# Altium PCB PCB de PWM.PcbDoc
Units mm, origin at the board's own origin, x right, y up, seen from the top; angles counter-clockwise.
Board outline 49.02 x 53.8 mm, 2 copper layers (Top Layer, Bottom Layer); 20 components, 11 nets, 57 pads, 0 vias.
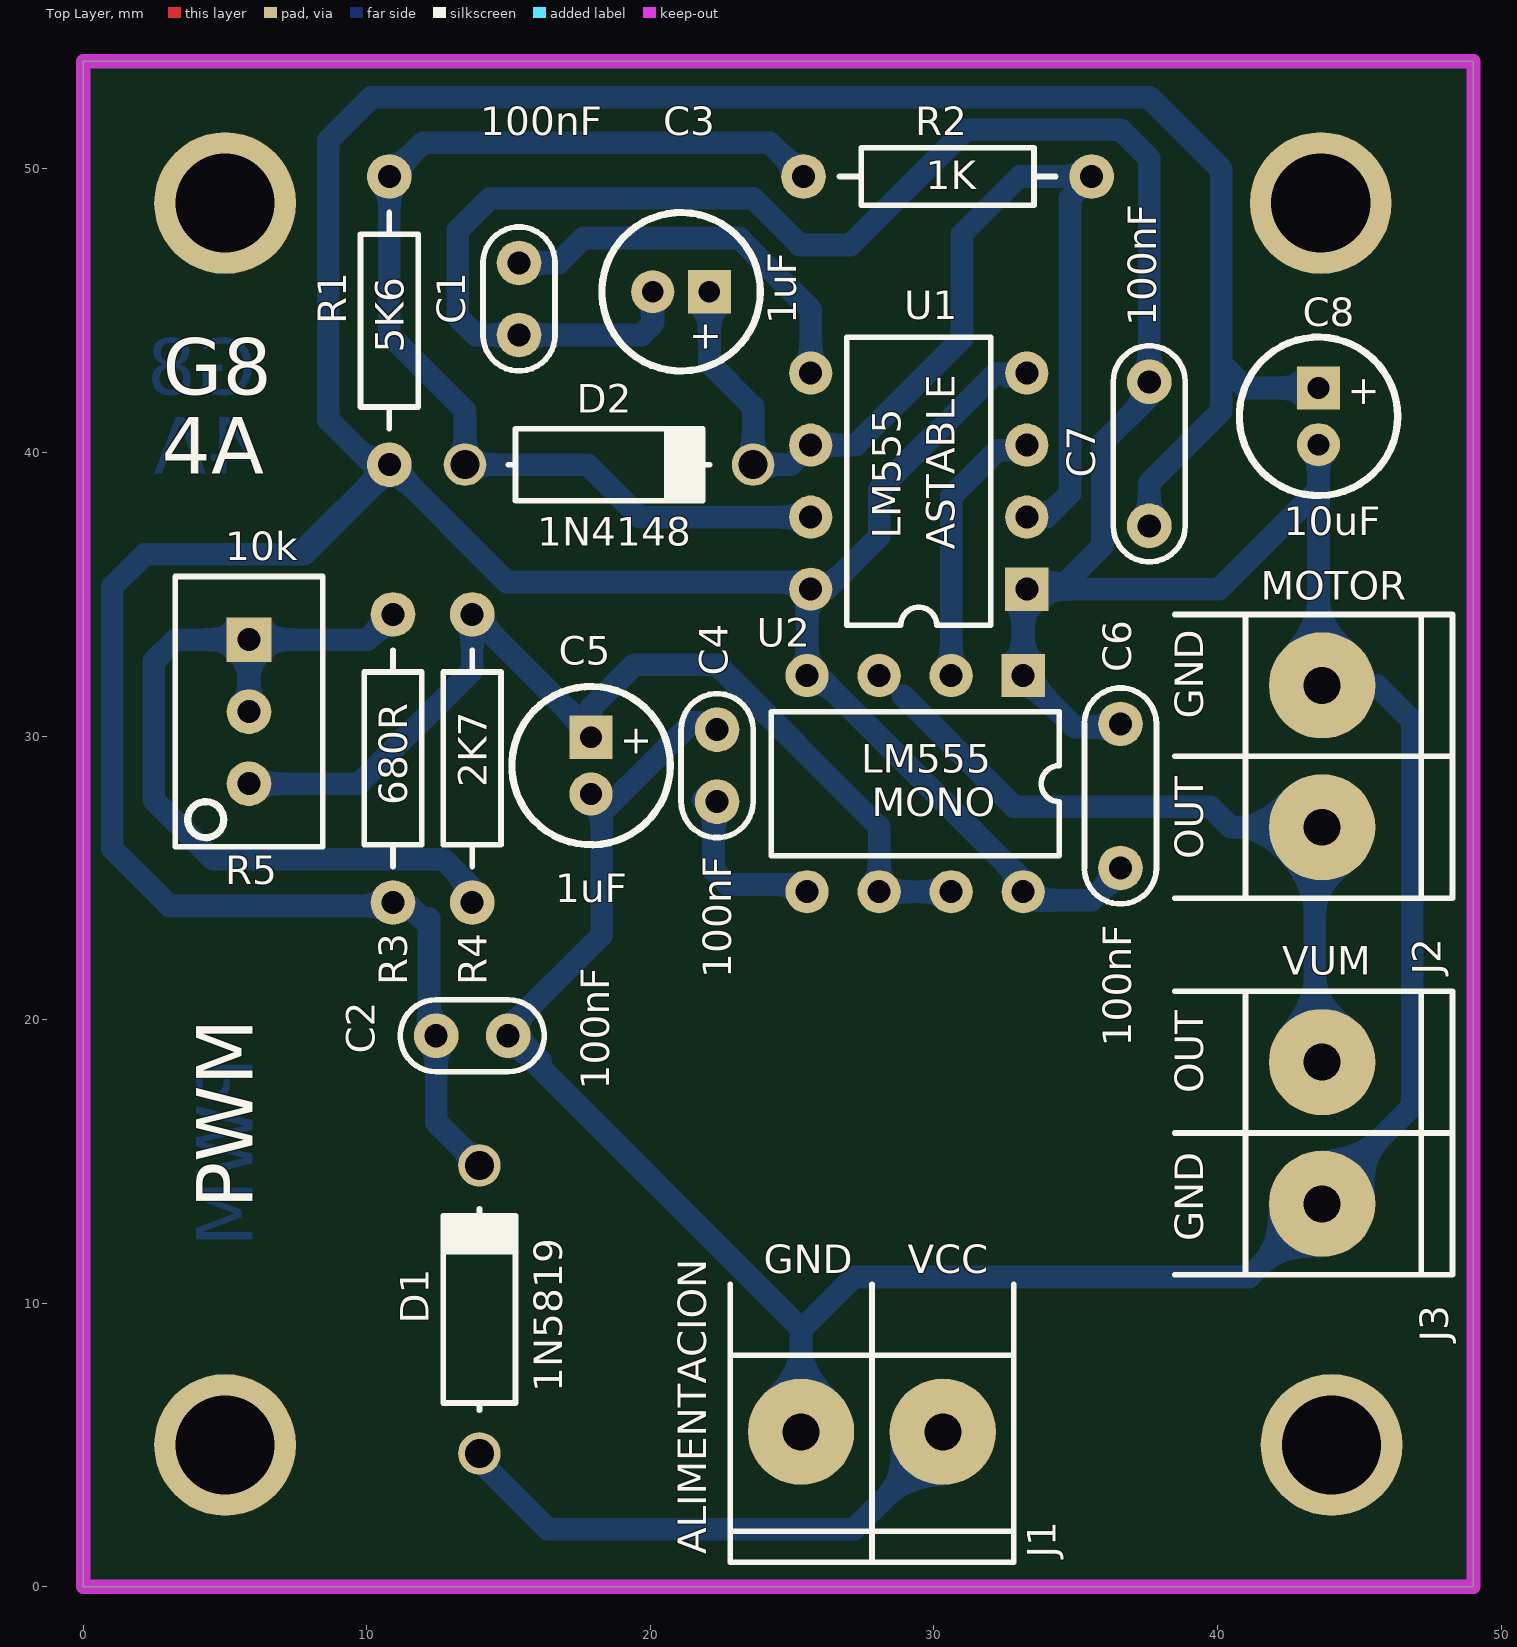
[diagram p0: Top Layer view]
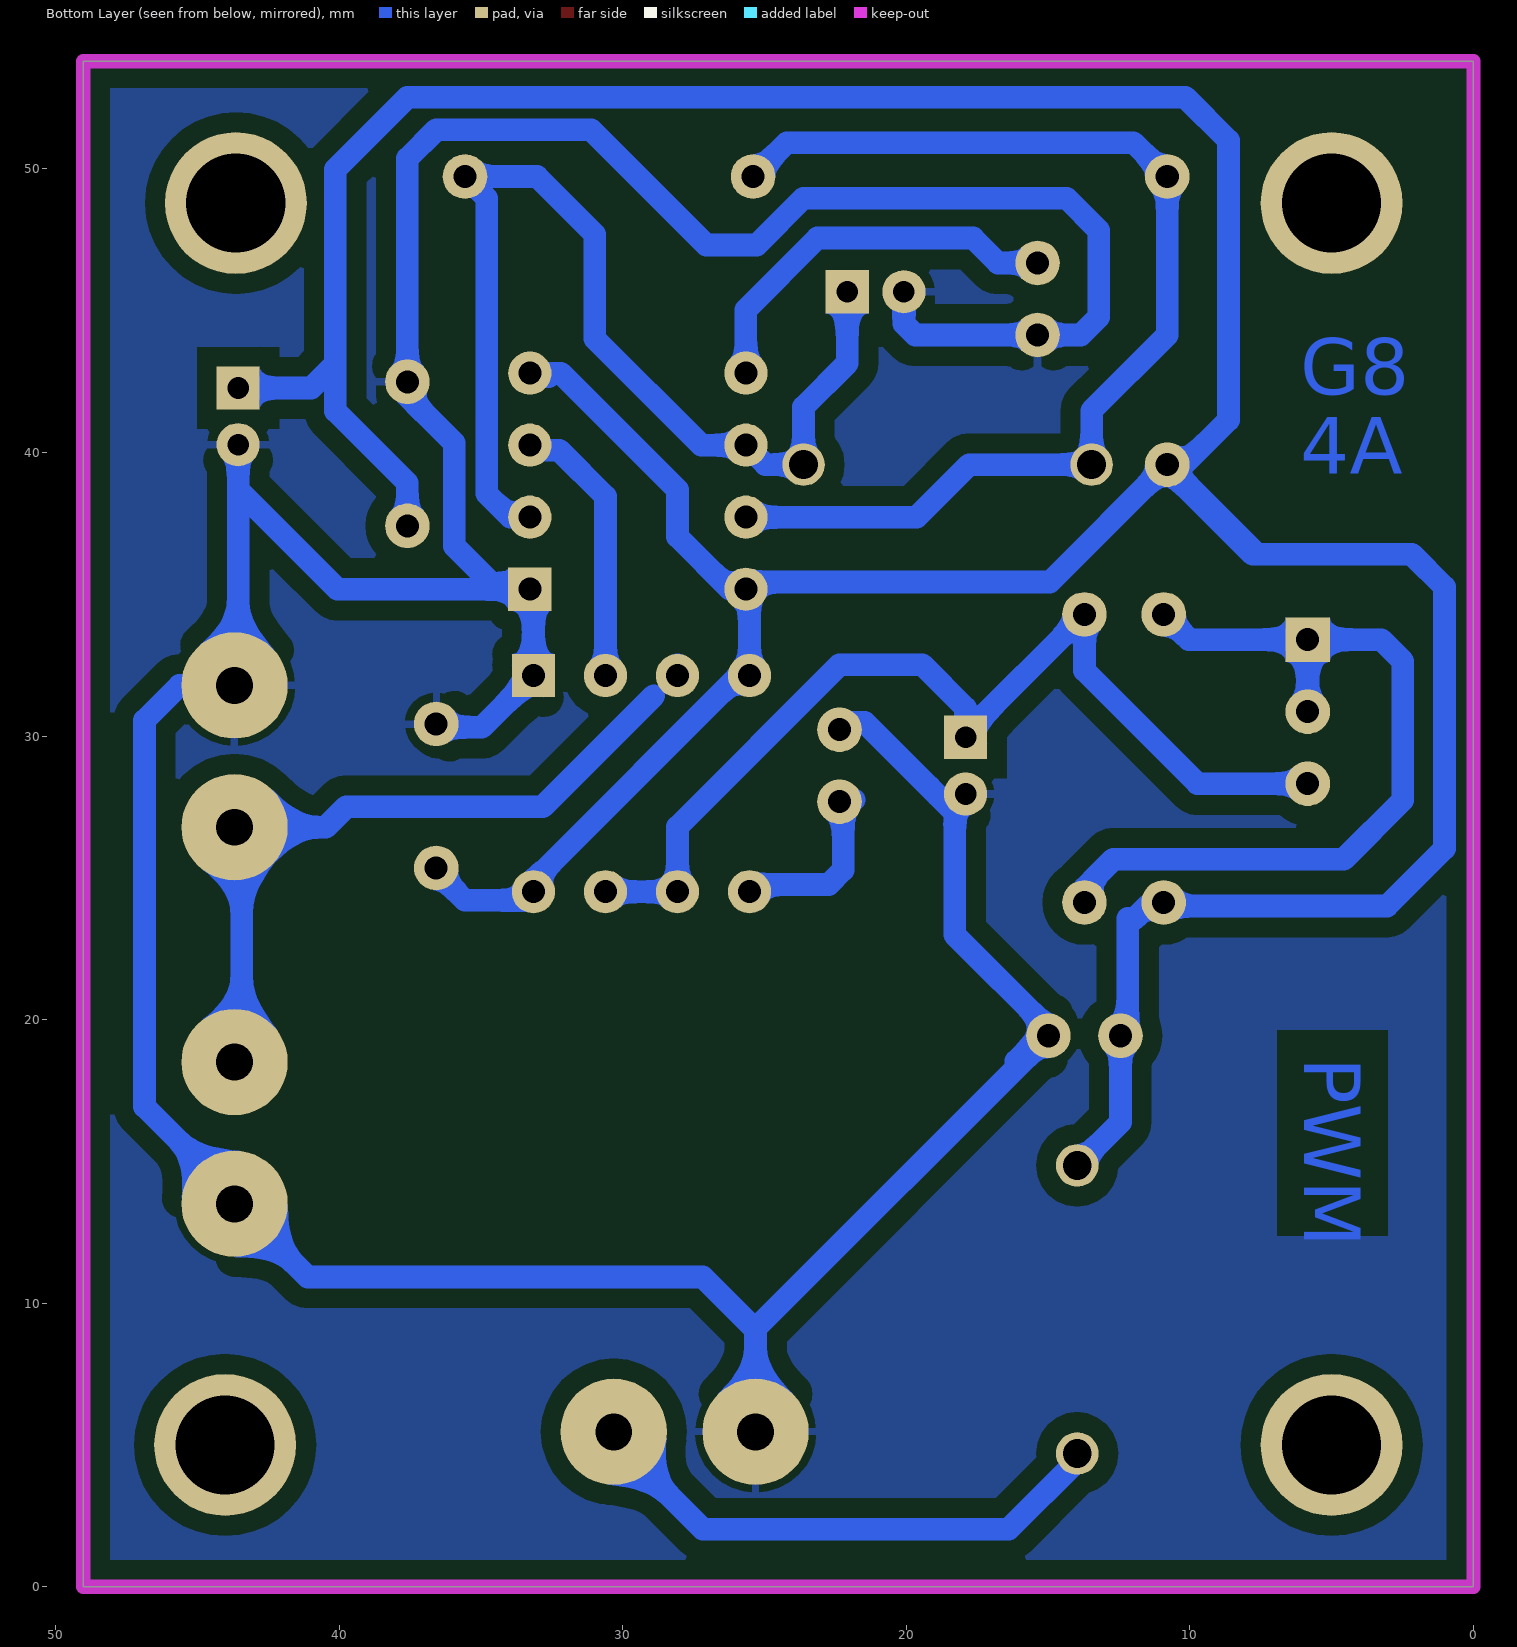
[diagram p1: Bottom Layer view, seen from below]
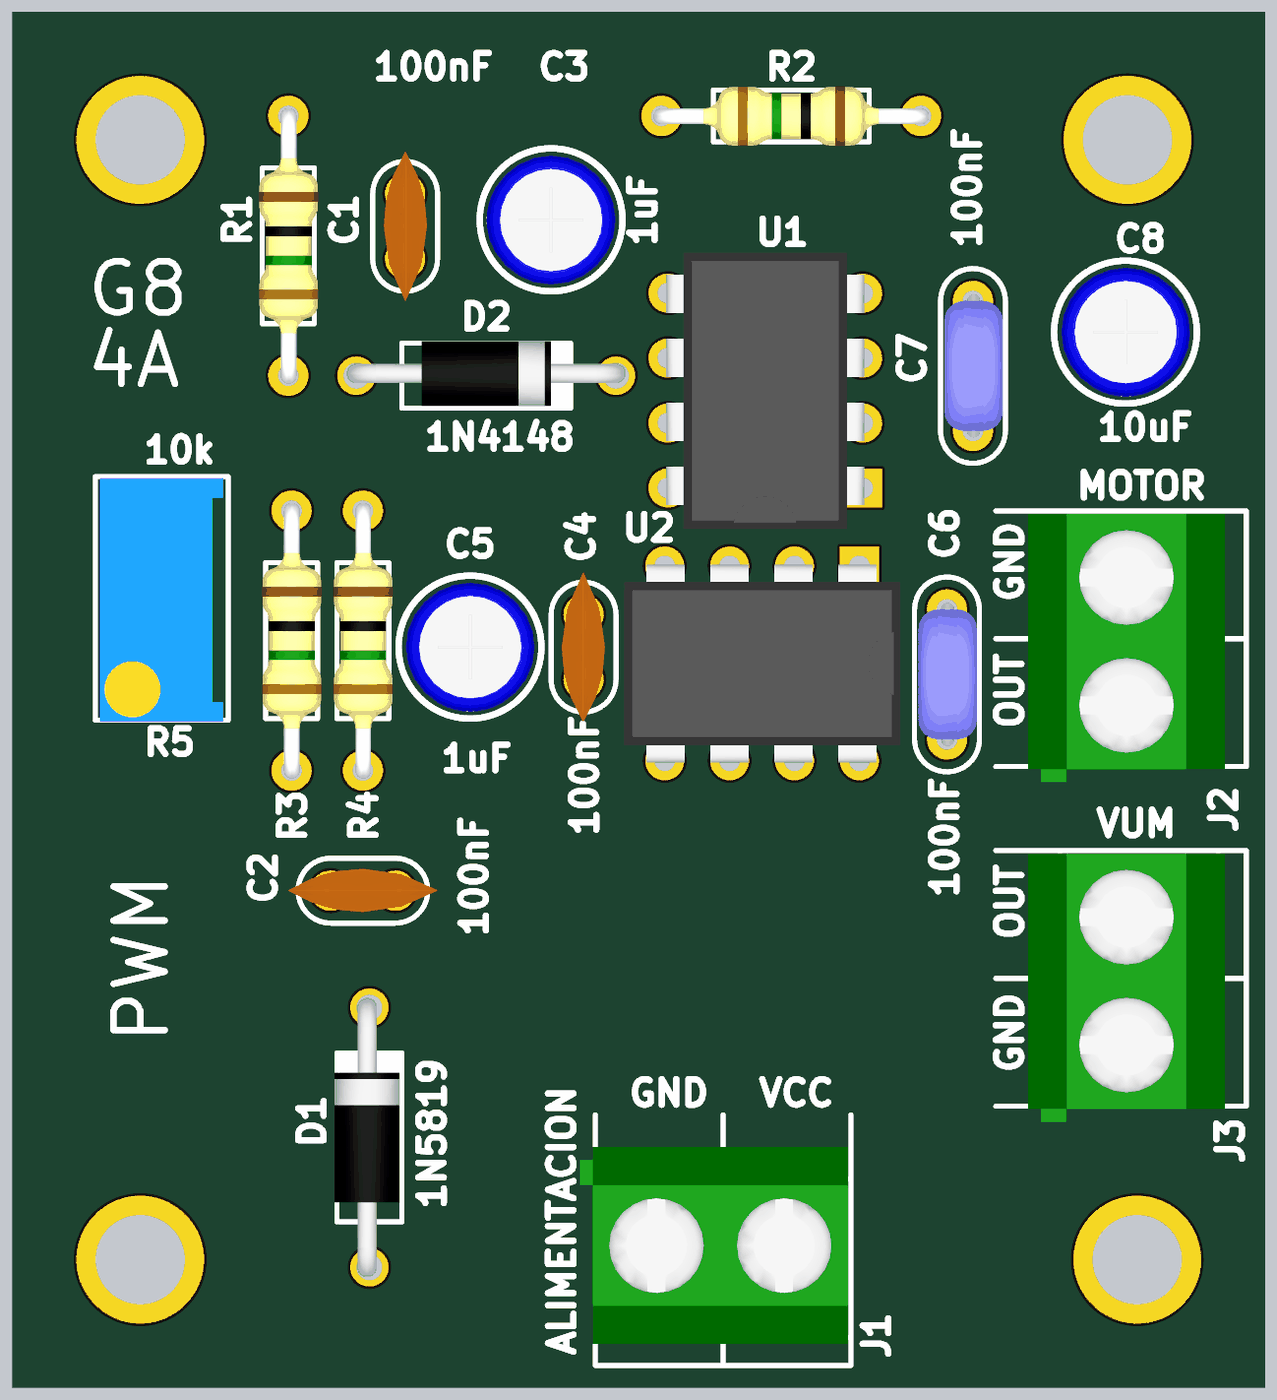
[diagram p2: 3D render of the assembled board from above, using the file's embedded part models]

## Layer stack, top to bottom
Top Solder: solder mask 0.0102, Solder Resist, Dk 3.5
Top Layer: signal copper 0.0356
Dielectric1: dielectric 0.32, FR-4, Dk 4.8
Bottom Layer: signal copper 0.0356
Bottom Solder: solder mask 0.0102, Solder Resist, Dk 3.5

## Board outline
0,0 0,53.796 49.022,53.796 49.022,0

## Design rules (kind name [scope] priority, off if disabled: settings)
Clearance polygon [InPolygon] p1: gap=0.7
Clearance Clearance_1 [All] p2: gap=0.3
PolygonConnect [All] p1: connectstyle=Relief reliefconductorwidth=0.254 reliefentries=4 polygonreliefangle="90 Angle" airgapwidth=0.254
RoutingLayers [All] p1: top layer_v5=FALSE bottom layer_v5=TRUE
RoutingVias [All] p1: holewidth=0.711 width=1.27 viastyle="Through Hole" minholewidth=0.711 minwidth=1.27 maxholewidth=0.711 maxwidth=1.27
SolderMaskExpansion [All] p1: expansion=0.102
UnpouredPolygon [All] p1: allowunpoured=FALSE
Width [All] p1: maxlimit=0.8 minlimit=0.8 preferedwidth=0.8
28 further rules are at their usual default settings.

## Components (designator, comment, footprint, x,y, rotation, side; value= is the part's Value field where it differs from the comment)
C1 "100nF" CAP100 15.367,45.414 r270 top
C2 "100nF" CAP100 13.716,19.431 r0 top
C3 "1uF" CAP100RP 21.082,45.668 r180 top
C4 "100nF" CAP100 22.352,28.956 r90 top
C5 "1uF" CAP100RP 17.907,28.956 r270 top
C6 "100nF" CAP200 36.576,27.888 r90 top
C7 "100nF" CAP200 37.592,39.953 r90 top
C8 "10uF" CAP100RP 43.561,41.275 r270 top
D1 "1N5819" DO41 13.97,9.779 r90 top
D2 "1N4148" DO41 18.542,39.572 r0 top
J1 "ALIMENTACION" BORNERA2 27.813,5.461 r90 top
J2 "MOTOR" BORNERA2 43.688,29.285 r180 top
J3 "VUM" BORNERA2 43.688,16.002 r180 top
R1 "5K6" RES400 10.795,49.732 r270 top
R2 "1K" RES400 35.56,49.732 r180 top
R3 "680R" RES400 10.922,34.29 r270 top
R4 "2K7" RES400 13.716,34.29 r270 top
R5 "10k" "PRESET V" 5.842,30.861 r270 top
U1 "LM555" DIP8 33.274,35.179 r180 top
U2 "LM555" DIP8 33.147,32.131 r270 top

## Footprints (in the part's own frame and the unit in brackets; to place one, negate y for a bottom-side part, rotate by r counter-clockwise, add the part's x,y. Pads: shape width x height; smd on the part's side, far side on the other; paste and mask are expansions set on the pad)
BORNERA2 [mm] "Bornera con Tornillos 5mm separación"
  round 3.75 hole 1.3: 1(0,2.5) 2(0,-2.5)
  silkscreen extent -4.6,-5 5.2,5, body extent -3.76,-4.89 3.94,5.61, height 10
CAP100 [mil]
  round 62 hole 32: 1(-50,0) 2(50,0)
  silkscreen extent -100,-50 100,50, body extent -115,-33 115,34, height 241
CAP100RP [mil] "Body diameter 5mm"
  rect 60x60 hole 30: 1(-39.37,0)
  round 60 hole 30: 2(39.37,0)
  silkscreen extent -110,-110 110,110, body extent -99,-99 99,100, height 454
CAP200 [mil]
  round 62 hole 32: 1(-100,0) 2(100,0)
  silkscreen extent -150,-50 150,50, body extent -110,-46 110,44, height 246
DIP8 [mil]
  rect 60x60 hole 32: 1(0,0)
  round 60 hole 32: 2(0,-100) 3(0,-200) 4(0,-300) 5(300,-300) 6(300,-200) 7(300,-100) 8(300,0)
  silkscreen extent 50,-350 250,50, body extent -3,-363 303,63, height 177
DO41 [mm]
  round 1.5 hole 1.016: 1(-5.08,0) 2(5.08,0)
  silkscreen extent -3.56,-1.27 3.56,1.27, body extent -5.46,-1.19 5.46,1.37, height 2.03
"PRESET V" [mil]
  rect 62x62 hole 32: 1(-100,0)
  round 62 hole 32: 2(0,0) 3(100,0)
  silkscreen extent -188,-102 188,102, body extent -185,-95 190,95, height 455
RES400 [mil]
  round 62 hole 32: 1(0,0) 2(400,0)
  silkscreen extent 50,-40 350,40, body extent -12,-45 412,46, height 96

## Part data
C1 C2 C4 C6 C7: library part CAP
C3 C5 C8: library part CAPPOL
D1 D2: library part DIODO
J1 J2 J3: library part "BORNERA 2"
R1 R2 R3 R4: library part RES
R5: library part PRESET
U1 U2: "Timer"

## Free pads (board coordinates)
  round 5 hole 3.5: 0(43.641,48.796) 1(5,48.796) 2(5,5) 2(44.022,5)

## Nets (pads, with @x,y where several pads share a name; then routed paths per layer and width w, separated by ;. In a path a pad name is that pad's centre, name@x,y a point inside that pad or via, vN(x,y) a via of type N, cw(c..) or ccw(c..) an arc to the next point about the centre after c; other vN are vias at no path point)
GND: C1.2 C2.2 C3.2 C4.2 C5.2 C6.2 C7.2 C8.2 J1.1 J2.2 J3.1 U1.1 U2.1 | length 158.2
  Bottom Layer w0.8: C2.2 25.313,9.104 ; 16.129,18.542 14.986,19.685 18.288,22.987 18.288,27.305 21.463,30.48 C4.2@21.844,30.48 ; C3.2 20.082,44.541 19.685,44.144 C1.2 13.843,44.144 13.208,44.779 13.208,47.827 14.351,48.97 23.622,48.97 25.273,47.319 27.051,47.319 31.115,51.383 36.576,51.383 37.592,50.367 C7.2 37.592,41.985 35.941,40.334 35.941,36.703 34.619,35.381 33.476,35.381 U1.1 40.057,35.179 43.561,38.683 ; J1.1 25.313,9.104 ; U1.1@33.274,35.052 33.147,34.925 U2.1 34.965,30.313 36.461,30.313 C6.2 ; J3.1@43.434,13.502 46.863,16.931 46.863,30.553 45.631,31.785 ; J2.2@43.561,31.912 43.561,38.683 ; C8.2 43.561,38.683 ; J3.1 41.108,10.922 27.178,10.922 25.36,9.104 25.313,9.104
NetC1_1: C1.1 U1.5 | length 13.9
  Bottom Layer w0.8: C1.1 16.764,46.684 17.641,47.561 23.126,47.561 25.654,45.033 U1.5
NetC4_1: C4.1 U2.5 | length 6.5
  Bottom Layer w0.8: C4.1@21.844,27.749 22.225,27.749 22.225,25.273 22.733,24.765 25.273,24.765 U2.5
NetC5_1: C5.1 R4.1 R5.3 U2.6 U2.7 | length 36.4
  Bottom Layer w0.8: R5.3 9.725,28.321 13.716,32.312 R4.1 C5.1@17.907,30.099 ; C5.1 C5.1@17.907,30.099 ; U2.7 U2.6 28.067,26.797 22.352,32.512 19.431,32.512 17.907,30.988 C5.1@17.907,30.099
NetD1_1: D1.1 J1.2 | length 19.2
  Bottom Layer w0.8: D1.1 13.97,4.445 16.383,2.032 27.178,2.032 30.313,5.167 J1.2
NetD2_1: D2.1 R1.1 R2.2 U1.7 | length 39.8
  Bottom Layer w0.8: R2.2 24.205,50.927 11.99,50.927 R1.1 10.795,44.144 13.462,41.477 D2.1 17.78,39.572 19.633,37.719 U1.7
NetR3_1: R3.1 R4.2 R5.1 R5.2 | length 29.5
  Bottom Layer w0.8: R5.2 5.842,33.274 5.715,33.401 3.248,33.401 2.486,32.639 2.486,27.74 4.572,25.654 12.7,25.654 13.716,24.638 R4.2 ; R5.1 10.033,33.401 R3.1
OUT1: U1.3 U2.2 | length 9.7
  Bottom Layer w0.8: U2.2 30.607,38.449 32.239,40.081 33.223,40.081 U1.3@33.274,40.132
SALIDA: J2.1 J3.2 U2.3 | length 25.3
  Bottom Layer w0.8: U2.3@28.067,32.258 U2.3@28.067,32.512 ; 28.906,31.419 32.818,27.507 39.751,27.507 40.473,26.785 J2.1 43.434,26.531 J3.2@43.434,18.502
THR: C3.1 D2.2 R2.1 U1.2 U1.6 | length 38.7
  Bottom Layer w0.8: C3.1 22.082,43.144 23.622,41.604 D2.2 24.967,39.572 U1.6@25.59,40.195 ; U1.6@25.654,40.132 U1.6@25.59,40.195 ; U1.2 33.961,37.719 34.798,38.556 34.798,48.97 R2.1 33.02,49.732 30.988,47.7 30.988,44.017 27.23,40.259 U1.6 ; U1.6@25.59,40.195 25.527,40.259 U1.6 ; U1.6@25.59,40.195 U1.6
VCC: C2.1 C6.1 C7.1 C8.1 D1.2 R1.2 R3.2 U1.4 U1.8 U2.4 U2.8 | length 155.1
  Bottom Layer w0.8: 7.784,36.412 R1.2@10.795,39.424 ; R3.2@10.36,24.003 3.048,24.003 1.016,26.035 1.016,35.254 2.174,36.412 7.635,36.412 R1.2 ; R3.2@11.503,24.003 11.938,23.568 ; 12.192,23.568 12.192,19.939 12.446,19.685 C2.1 12.446,16.383 D1.2 ; U2.4 U2.4@25.527,32.512 ; U1.8@25.527,34.925 U2.4@25.527,32.512 ; U1.8 25.4,35.433 14.934,35.433 R1.2 ; U1.8@26.214,35.179 28.067,37.032 28.067,38.683 32.183,42.799 U1.4 ; U1.4@32.607,42.672 U1.4@33.274,42.672 ; C6.1 36.576,25.221 35.56,24.205 33.453,24.205 U2.8 33.147,24.892 U2.4@25.527,32.512 ; C7.1 37.592,38.921 40.132,41.461 40.132,43.128 ; C8.1 40.985,42.275 40.132,43.128 ; R1.2 10.212,39.572 8.636,41.148 8.636,51.002 10.16,52.526 37.592,52.526 40.132,49.986 40.132,43.128

## Polygon pours and split planes (outlines as drawn)
GND on Bottom Layer "Polygon" (solid, remove dead copper, pour order 3): 0.254,0 48.641,0 48.641,53.415 49.022,53.796 48.97,53.848 0.381,53.848

## Keep-outs
Keep-Out Layer:
  the board outline again, w0.5

## Other copper
Bottom Layer:
  text "G8" at 6.096,42.037 h2
  text "4A" at 6.096,39.243 h2
  text "PWM" at 5.969,18.669 h2 r90

## Silkscreen, mask and mechanical layers (free items; w line width, h text height)
Top Overlay:
  text "G8" at 2.794,42.037 h2
  text "4A" at 2.764,39.243 h2
  text "ASTABLE" at 30.734,36.576 h1 r90
  text "GND" at 39.497,30.607 h1 r90
  text "MONO" at 27.813,27.178 h1
  text "OUT" at 39.497,25.654 h1 r90
  text "OUT" at 39.497,17.399 h1 r90
  text "PWM" at 5.969,13.335 h2 r90
  text "GND" at 39.497,12.192 h1 r90
  text "GND" at 24.003,11.049 h1
  text "VCC" at 29.083,11.049 h1

## Text inside footprints (layer, text, board x,y; h text height)
C3: Top Overlay "+" at 22.53,44.5 h1.02 r180
C5: Top Overlay "+" at 19.075,30.404 h1.02 r270
C8: Top Overlay "+" at 44.729,42.723 h1.02 r270